# EAGLE board lock-board_v2 (EAGLE 7.6.0)
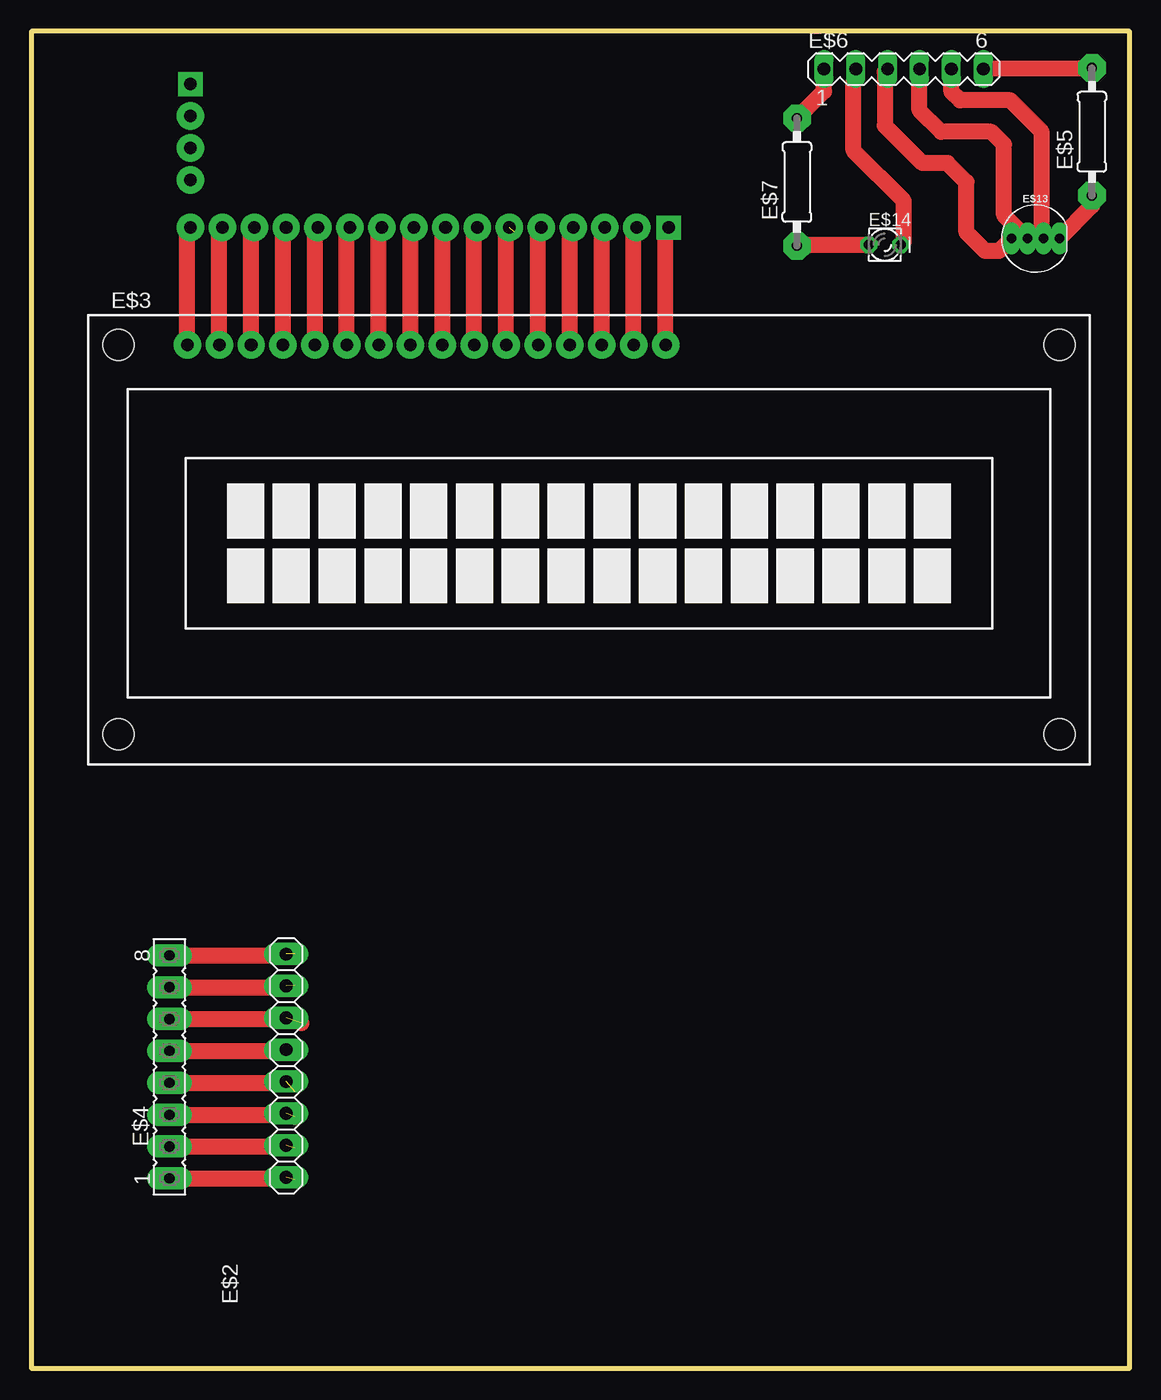
[diagram p0: board, top side]
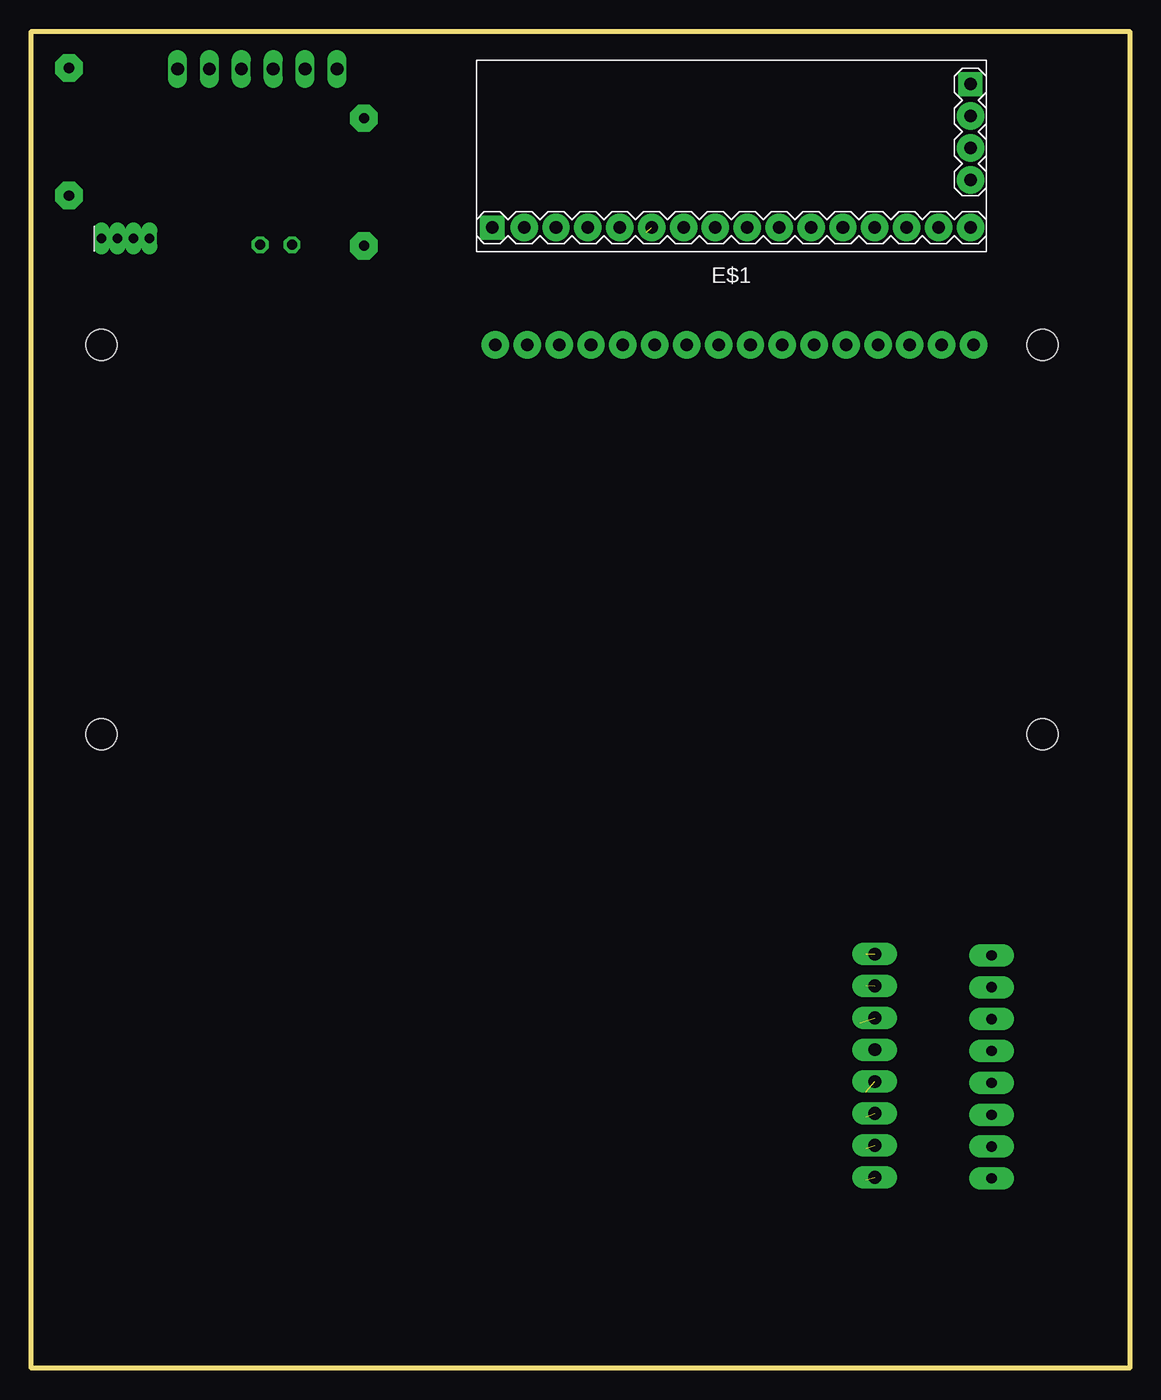
[diagram p1: board, bottom side, seen from below]

Size 87.5 x 106.5 mm. Coordinates in mm from the lower left corner, seen from the top.
Outline: 0,106.5 0,0 87.5,0 87.5,106.5 0,106.5
Copper layers (1*16): Top 0.035mm / dielectric 1.5mm / Bottom 0.035mm
Design rules "default": minimum track width 10mil, minimum drill 24mil, track to track 8mil, track to pad 8mil, pad to pad 8mil, via to via 8mil, smd to smd 8mil, copper to edge 40mil, drill to drill 8mil, minimum pad ring 10mil, minimum via ring 8mil, stop-mask expansion 4mil, vias tented up to drill 0mil, thermal gap 10mil

## Footprints (pad centres in the part's own frame; a part is rotated, then mirrored left to right if it is on the bottom)
LCD-I2C-CONVERTER = drill 1 pad 1.93 square: J1.1 -19.05,-5.08; J2.1 19.05,6.35 | drill 1 pad 2.184: J1.2 -19.05,-2.54; J1.3 -19.05,0; J1.4 -19.05,2.54; J2.2 16.51,6.35; J2.3 13.97,6.35; J2.4 11.43,6.35; J2.5 8.89,6.35; J2.6 6.35,6.35; J2.7 3.81,6.35; J2.8 1.27,6.35; J2.9 -1.27,6.35; J2.10 -3.81,6.35; J2.11 -6.35,6.35; J2.12 -8.89,6.35; J2.13 -11.43,6.35; J2.14 -13.97,6.35; J2.15 -16.51,6.35; J2.16 -19.05,6.35
RFID-RC522 = drill 1.016 pad 1.778 long: 3V3 -8.89,0; GND -3.81,0; IRQ -1.27,0; MISO 1.27,0; MOSI 3.81,0; RST -6.35,0; SCK 6.35,0; SS 8.89,0
TUXGR_16X2_R2 = drill 1 pad 2.184: 1 -32,15.5; 2 -29.46,15.5; 3 -26.92,15.5; 4 -24.38,15.5; 5 -21.84,15.5; 6 -19.3,15.5; 7 -16.76,15.5; 8 -14.22,15.5; 9 -11.68,15.5; 10 -9.14,15.5; 11 -6.6,15.5; 12 -4.06,15.5; 13 -1.52,15.5; 14 1.02,15.5; 15 3.56,15.5; 16 6.1,15.5 | hole 2.5: -37.5,-15.5; 37.5,-15.5; -37.5,15.5; 37.5,15.5
FE08 = drill 0.813 pad 1.778 long: 1 -8.89,0; 2 -6.35,0; 3 -3.81,0; 4 -1.27,0; 5 1.27,0; 6 3.81,0; 7 6.35,0; 8 8.89,0
0207/10 = drill 0.813 pad 2.184 octagon: 1 -5.08,0; 2 5.08,0
MA06-1 = drill 1.016 long: 1 -6.35,0; 2 -3.81,0; 3 -1.27,0; 4 1.27,0; 5 3.81,0; 6 6.35,0
LED-RGB-THRU = drill 0.762 pad 0.889 long: 1 1.905,0; 2 0.635,0; 3 -0.635,0; 4 -1.905,0
LED_LD260 = drill 0.813 octagon: A -1.27,0; K 1.27,0

## Placement (x,y rotation side)
E$1  [LCD-I2C-CONVERTER]  31.73,97.22 180 bottom
E$2  [RFID-RC522]  20.3,24.1 90 top
E$3  [TUXGR_16X2_R2]  44.43,66.01 0 top
E$4  [FE08]  11,24 90 top
E$5  [0207/10]  84.5,98.5 90 top
E$6  [MA06-1]  69.5,103.5 0 top
E$7  [0207/10]  61,94.5 90 top
E$13  [LED-RGB-THRU]  80,90 0 top
E$14  [LED_LD260]  68,89.5 0 top

## Library data of the parts
E$1 = converter_lcd_serial_i2c
E$2 = mfrc522-module
E$3 = display-lcd
E$4 = con-lsta
E$5 E$7 E$14 = eagle-ltspice
E$6 = con-lstb
E$13 = SparkFun-LED

## Nets
S$1: E$1.J2.16 E$3.1
S$2: E$1.J2.15 E$3.2
S$3: E$1.J2.14 E$3.3
S$4: E$1.J2.13 E$3.4
S$5: E$1.J2.12 E$3.5
S$6: E$1.J2.11 E$3.6
S$7: E$1.J2.10 E$3.7
S$8: E$1.J2.9 E$3.8
S$9: E$1.J2.8 E$3.9
S$10: E$1.J2.7 E$3.10
S$11: E$7.1 E$14.A
S$12: E$1.J2.4 E$3.13
S$13: E$1.J2.3 E$3.14
S$14: E$1.J2.2 E$3.15
S$15: E$1.J2.1 E$3.16
S$16: E$1.J2.5 E$3.12
S$17: E$2.SS E$4.8
S$18: E$2.SCK E$4.7
S$19: E$2.MOSI E$4.6
S$20: E$2.MISO E$4.5
S$21: E$4.4
S$22: E$2.GND E$4.3
S$23: E$2.RST E$4.2
S$24: E$2.3V3 E$4.1
S$25: E$2.IRQ
S$26: E$1.J2.6 E$3.11
S$27: E$6.1 E$7.2
S$28: E$5.2 E$6.6
S$29: E$5.1 E$13.1
S$30: E$6.5 E$13.2
S$31: E$6.4 E$13.3
S$32: E$6.3 E$13.4
S$33: E$6.2 E$14.K

## Tracks (layer width: path | path; a pad name or v marks a point on that pad's centre or on a via)
S$1
  Top 1.27: E$3.1 12.43,90.62 E$1.J2.16
S$2
  Top 1.27: E$3.2 14.97,90.62 E$1.J2.15
S$3
  Top 1.27: E$3.3 17.51,90.62 E$1.J2.14
S$4
  Top 1.27: E$3.4 20.05,90.62 E$1.J2.13
S$5
  Top 1.27: E$3.5 22.59,90.62 E$1.J2.12
S$6
  Top 1.27: E$3.6 25.13,90.62 E$1.J2.11
S$7
  Top 1.27: E$3.7 27.67,90.62 E$1.J2.10
S$8
  Top 1.27: E$3.8 30.21,90.62 E$1.J2.9
S$9
  Top 1.27: E$3.9 32.75,90.62 E$1.J2.8
S$10
  Top 1.27: E$3.10 35.29,90.62 E$1.J2.7
S$11
  Top 1.27: E$7.1 61.08,89.5 E$14.A
S$12
  Top 1.27: E$3.13 42.91,90.62 E$1.J2.4
S$13
  Top 1.27: E$3.14 45.45,90.62 E$1.J2.3
S$14
  Top 1.27: E$3.15 47.99,90.62 E$1.J2.2
S$15
  Top 1.27: E$3.16 50.53,90.62 E$1.J2.1
S$16
  Top 1.27: E$3.12 40.37,90.62 E$1.J2.5
S$17  (1 unrouted)
  Top 1.27: E$4.8 20.89,32.89 21,33
S$18  (1 unrouted)
  Top 1.27: E$4.7 20.85,30.35 21,30.5
S$19  (1 unrouted)
  Top 1.27: E$4.6 21.19,27.81 21.5,27.5
S$20
  Top 1.27: E$4.5 20.2,25.27 E$2.MISO
S$21
  Top 1.27: E$4.4 20.27,22.73
S$22  (1 unrouted)
  Top 1.27: E$4.3 20.81,20.19 21,20
S$23  (1 unrouted)
  Top 1.27: E$4.2 20.85,17.65 21,17.5
S$24  (1 unrouted)
  Top 1.27: E$4.1 20.89,15.11 21,15
S$25  (1 unrouted)
S$26  (1 unrouted)
  Top 1.27: E$3.11 37.83,90.62 E$1.J2.6
S$27
  Top 1.27: E$7.2 63.15,101.73 E$6.1
S$28
  Top 1.27: E$6.6 75.93,103.58 E$5.2
S$29
  Top 1.27: E$13.1 84.5,92.59 E$5.1
S$30
  Top 1.27: E$13.2 80.5,90.14 80.5,98.5 78,101 74,101 73.31,101.69 E$6.5
S$31
  Top 1.27: E$13.3 77.5,91.86 77.5,97.5 76.5,98.5 72.5,98.5 70.77,100.23 E$6.4
S$32
  Top 1.27: E$6.3 68,103.27 68,99 71,96 73,96 74.5,94.5 74.5,90.5 76,89 77.09,89 E$13.4
S$33
  Top 1.27: E$14.K 69.5,89.73 69.5,93 65.5,97 65.5,102.5 65.69,102.69 E$6.2